# Altium PCB LMAT_AMT_MAG_V1.PcbDoc (part 1 of 2)
Units mm, origin at the board's own origin, x right, y up, seen from the top; angles counter-clockwise.
Board outline 36.5 x 40.75 mm, 2 copper layers (Top Layer, Bottom Layer), stack 1.58 mm thick; 80 components, 45 nets, 210 pads, 110 vias.
Unrouted connection lines stored in the file: 13.
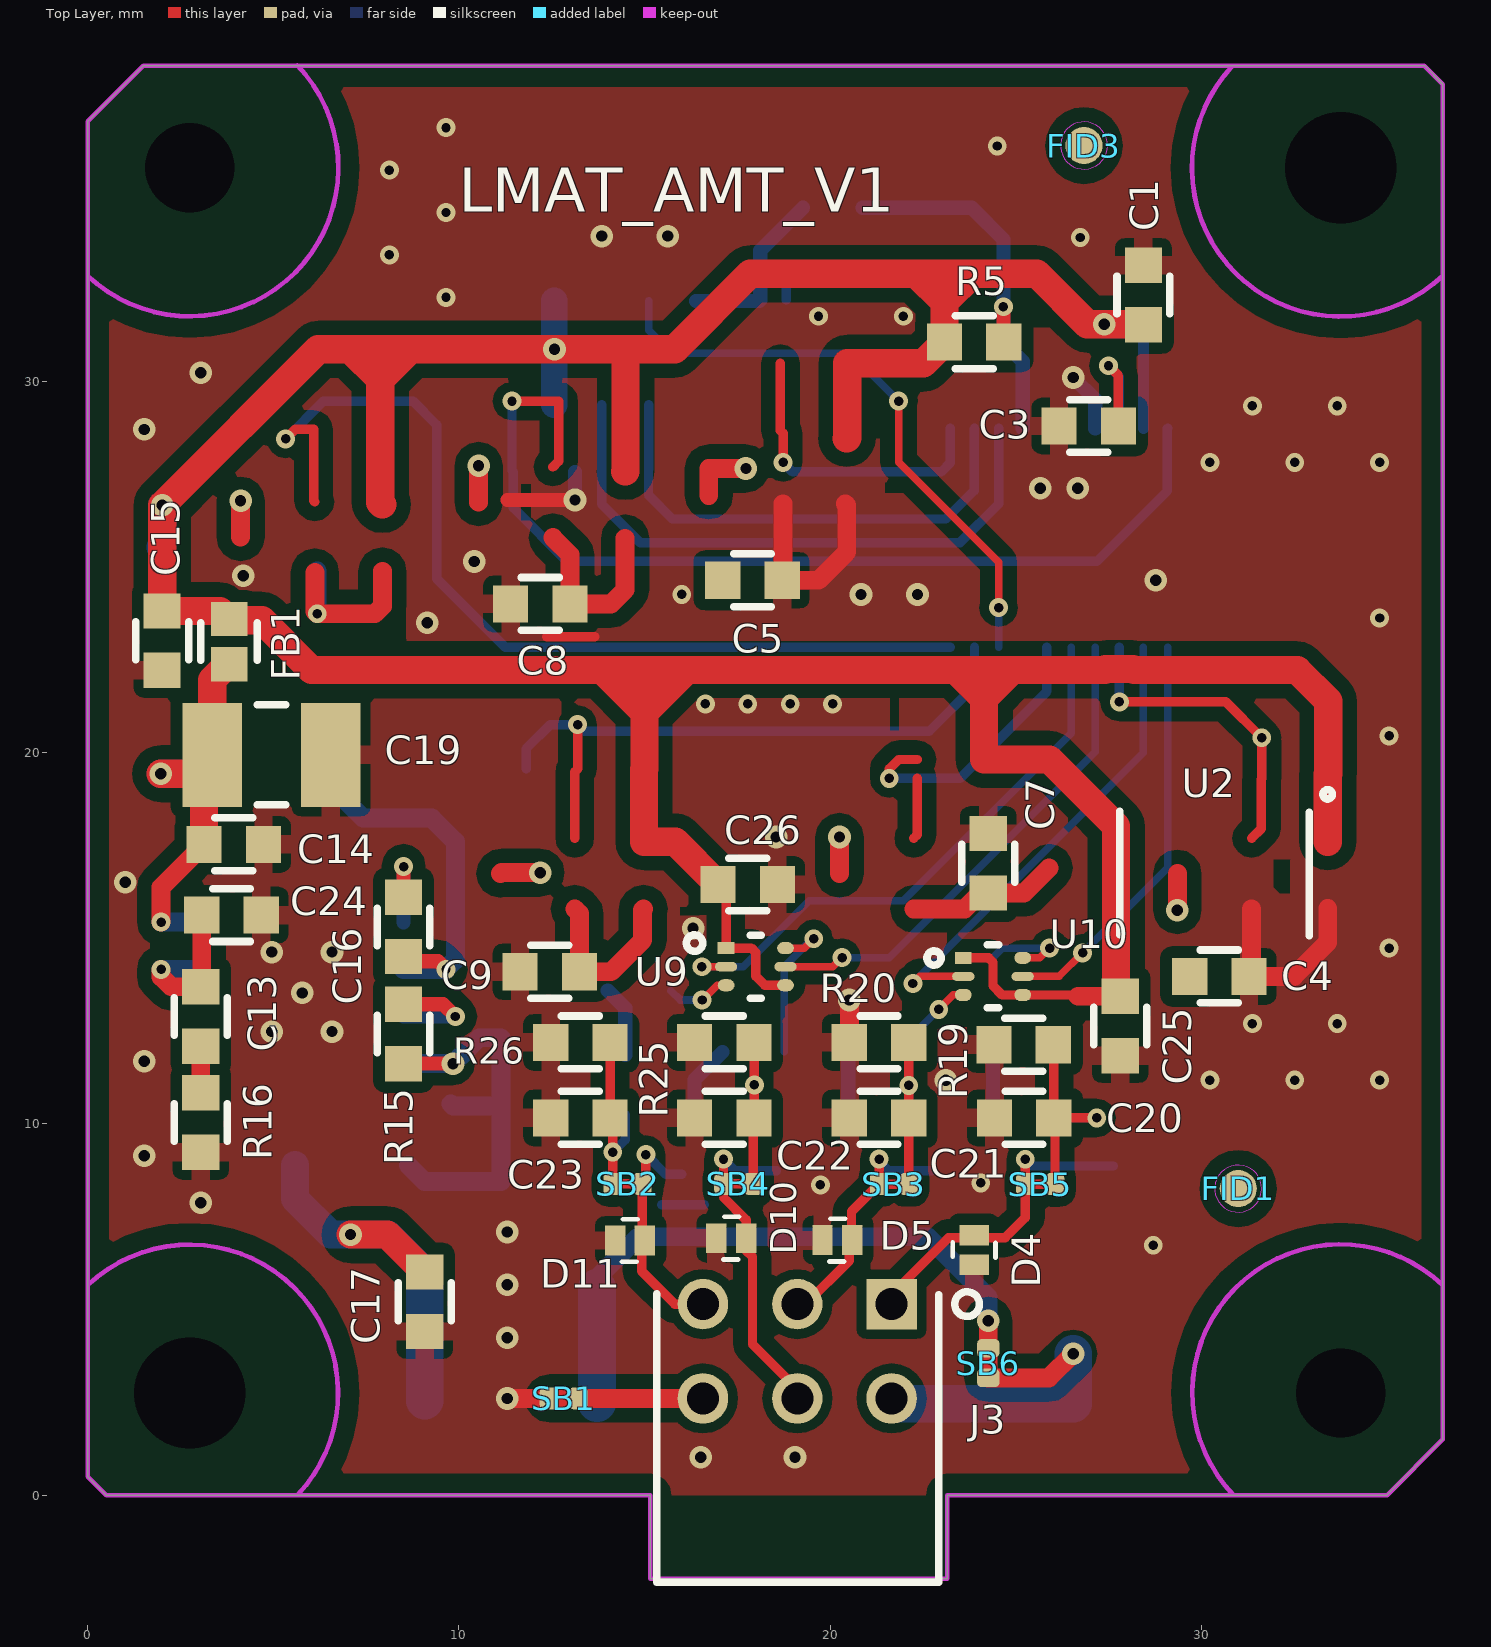
[diagram p0: Top Layer view]
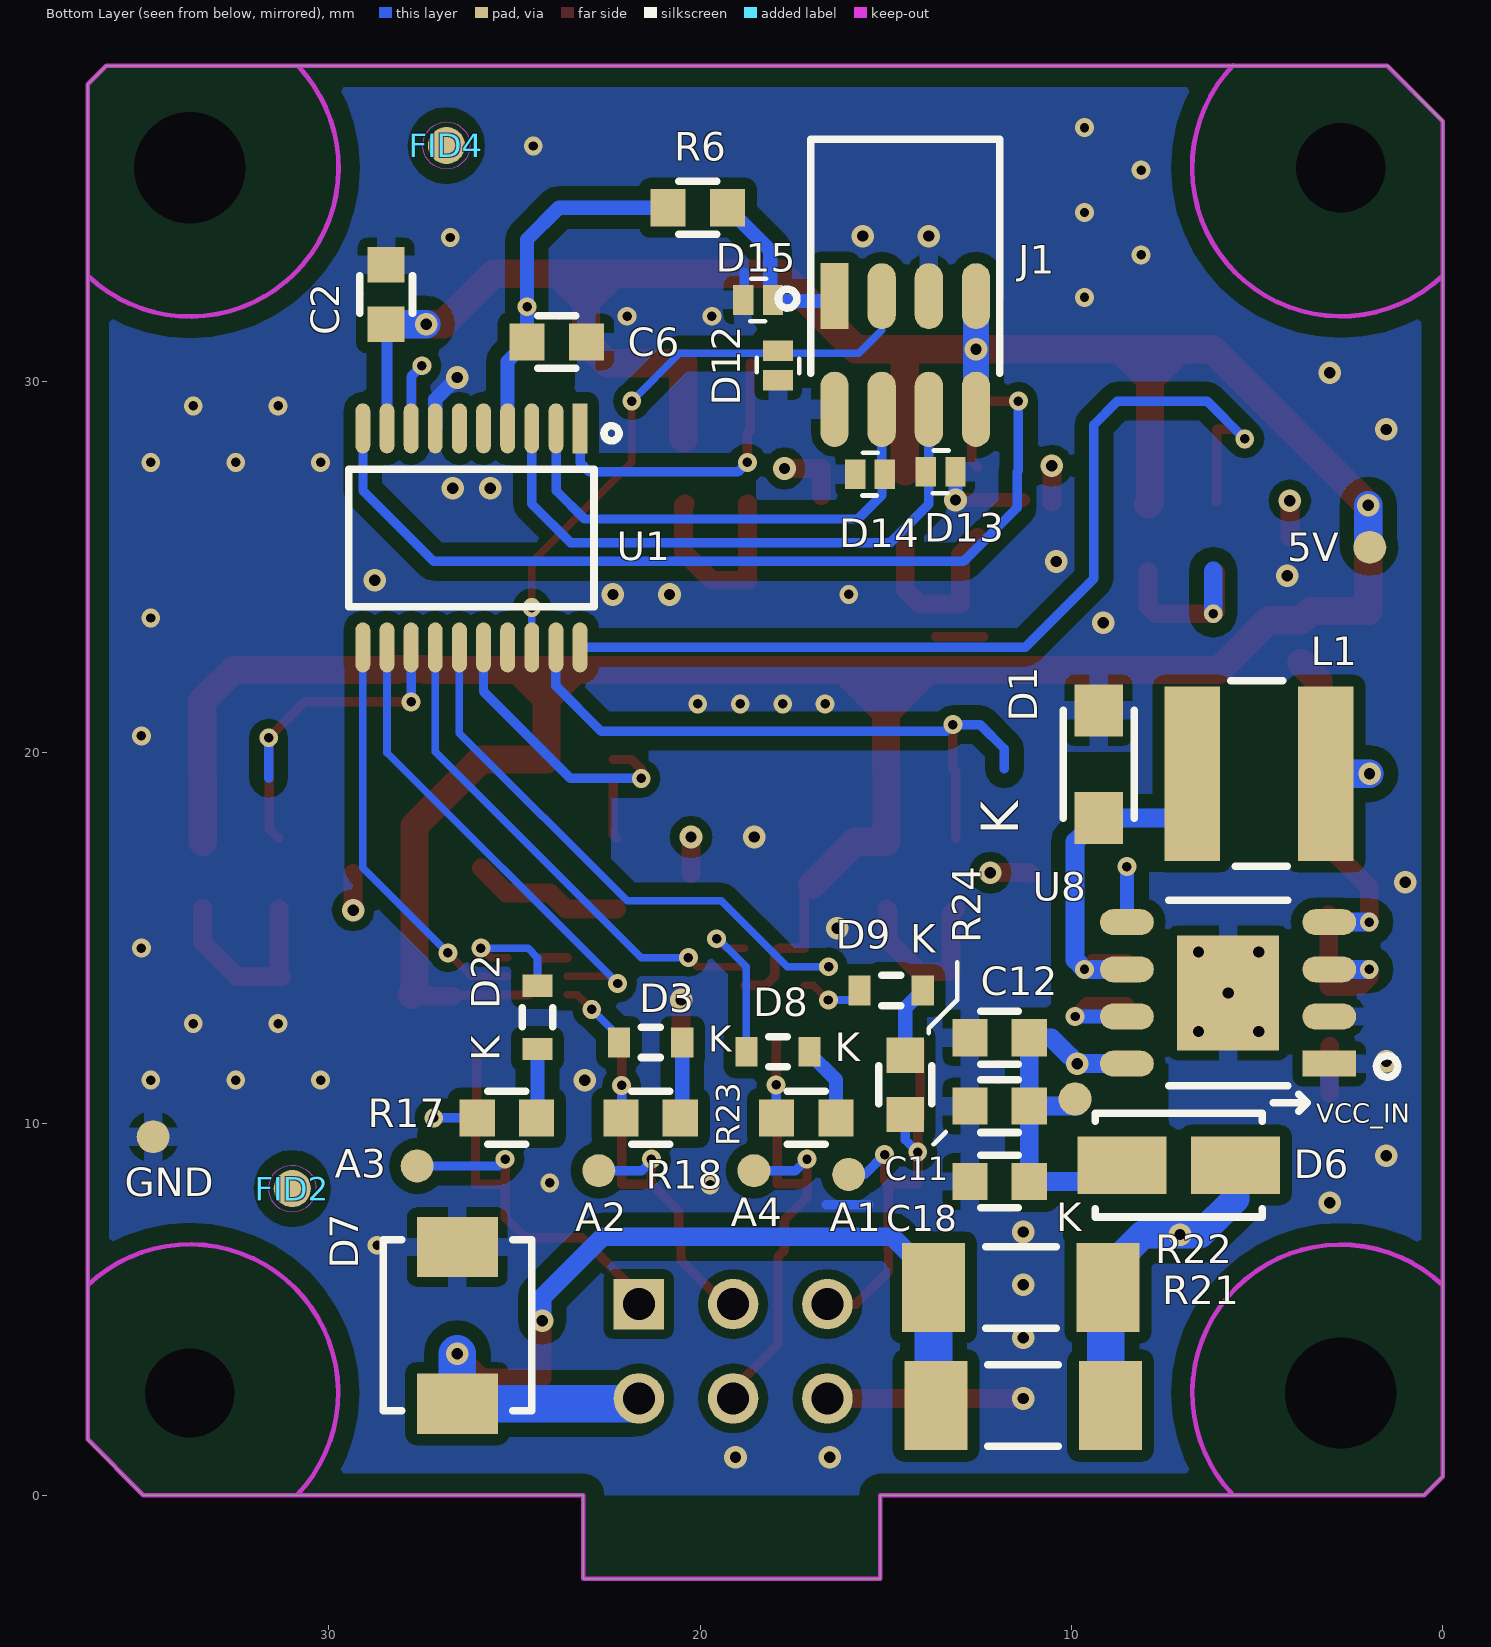
[diagram p1: Bottom Layer view, seen from below]
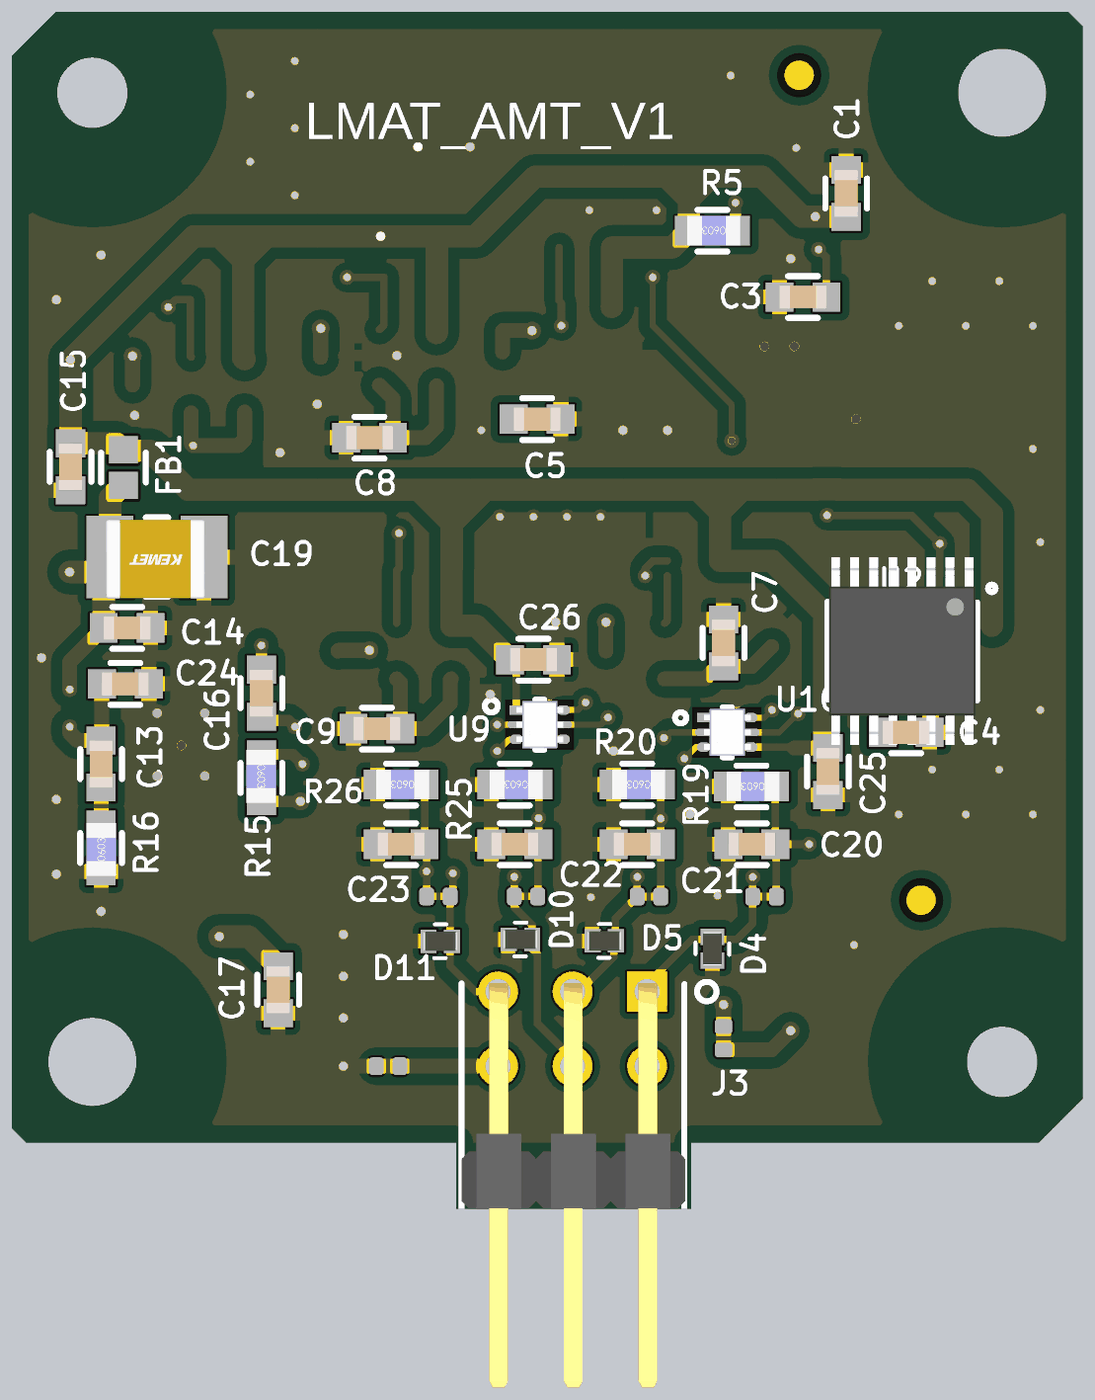
[diagram p3: 3D render of the assembled board from above, using the file's embedded part models]
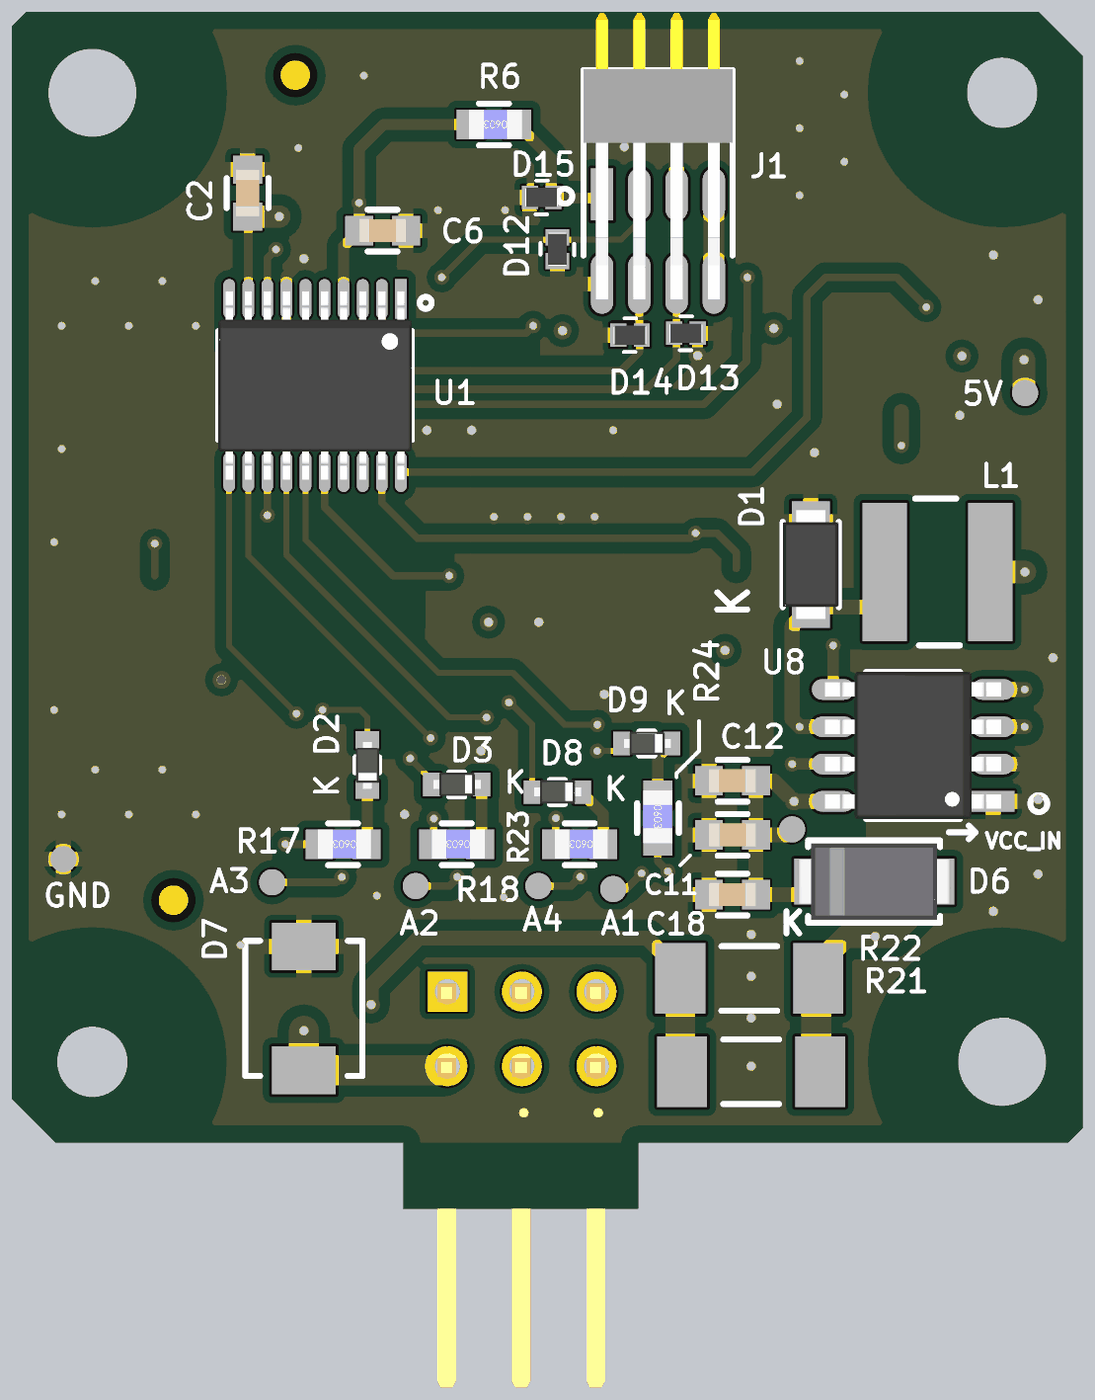
[diagram p4: 3D render of the assembled board from below, using the file's embedded part models]

## Layer stack, top to bottom
Top Solder: solder mask 0.0102, Solder Resist, Dk 3.5
Top Layer: signal copper 0.0356
Dielectric 1: core 1.5086, FR-4, Dk 4.2
Bottom Layer: signal copper 0.0356
Bottom solder: solder mask 0.0102, Solder Resist, Dk 3.5

## Board outline
0,0.5 0.5,0 15.15,0 15.15,-2.25 23.15,-2.25 23.15,0 35,0 36.5,1.5 36.5,38 36,38.5 1.5,38.5 0,37

## Design rules (kind name [scope] priority, off if disabled: settings)
AcuteAngle [All] p1: minimum=6.00000000000000E+0001 checktracksonly=TRUE
Clearance Clearance_keepout [(OnLayer('Keep-Out Layer'))] p1: gap=0.762 ignorepadtopadclearanceinfootprint=TRUE except(0: Arc-Text Arc-Hole Track-Text Track-Hole SMDPad-Text SMDPad-Hole THPad-Text THPad-Hole Via-Text Via-Hole Fill-Text Fill-Hole Poly-Text Poly-Hole Region-Text Region-Hole Text-Text Text-Hole; 0.254: Arc-Track Arc-SMDPad Arc-THPad Arc-Via Track-Track Track-SMDPad Track-THPad Track-Via SMDPad-Region; 0.381: Arc-Arc; 0.508: Arc-Poly Track-Poly; 0.635: Fill-Fill Poly-Poly)
Clearance [All] p2: gap=0.381 ignorepadtopadclearanceinfootprint=TRUE except(0: Arc-Hole Track-Hole SMDPad-Hole THPad-Hole Via-Hole Fill-Hole Poly-Hole Region-Hole Text-Hole; 0.203: Arc-Track Track-SMDPad SMDPad-Via; 0.254: Track-Track Track-Via Track-Region SMDPad-SMDPad SMDPad-Region THPad-Poly THPad-Region Via-Poly Via-Region; 0.305: SMDPad-Poly; 0.508: Poly-Poly)
ComponentClearance [All] p1 off: gap=0.508 collisioncheckmode=3 verticalgap=0.508 showdistances=FALSE
FanoutControl Fanout_Default [All] p1: bgadir=Out bgaviamode=Centered fanoutstyle=Auto fanoutdirection=Alternating viagrid=0.025 // Fanout_Default (Default Rule)
Height Bottom [All] p1: minheight=0 maxheight=5.5 prefheight=5
Height TOP [All] p2: minheight=0 maxheight=1.6 prefheight=1.5
Height [All] p3: minheight=0 maxheight=10 prefheight=5
HoleSize [All] p1: absolutevalues=TRUE maxlimit=25.4 minlimit=0.025 maxpercent=80.000 minpercent=20.000
HoleToHoleClearance [All] p1 off: gap=0.254 allowstackedmicrovias=TRUE
LayerPairs [All] p1 off: enforce=TRUE
MinimumSolderMaskSliver [All] p1 off: minsoldermaskwidth=0.076
PolygonConnect PolygonConnect_Via [IsVia] p1: connectstyle=Direct reliefconductorwidth=0.254 reliefentries=4 polygonreliefangle="90 Angle" airgapwidth=0.254
PolygonConnect [All] p2: connectstyle=Relief reliefconductorwidth=0.508 reliefentries=4 polygonreliefangle="90 Angle" airgapwidth=0.254
RoomDefinition AMT_HALL_EFFECT [InComponentClass('AMT_HALL_EFFECT')] p1: confinementstyle=ConfineIn formatcopy=TRUE lockcomponents=FALSE outline -1010.377,-263.778 -959.577,-263.778 -959.577,-238.378 -1010.377,-238.378
RoutingVias RoutingVias_PWR [InNetClass('PWR')] p1: holewidth=0.305 width=0.61 viastyle="Through Hole" minholewidth=0.305 minwidth=0.61 maxholewidth=0.508 maxwidth=1.016
RoutingVias [All] p2: holewidth=0.254 width=0.508 viastyle="Through Hole" minholewidth=0.254 minwidth=0.508 maxholewidth=0.508 maxwidth=1.016
SilkToSilkClearance [All] p1: silktosilkclearance=0.051
SilkToSolderMaskClearance [IsPad] p1: minsilkscreentomaskgap=0.051 clearancetoexposedcopper=TRUE
SolderMaskExpansion [All] p1: expansion=0.102
UnRoutedNet [All] p1: checkbadconnections=TRUE
UnpouredPolygon [All] p1: allowunpoured=TRUE allowshelved=TRUE
Width [All] p1: maxlimit=5.08 minlimit=0.203 preferedwidth=0.381
15 further rules are at their usual default settings.

## Classes and differential pairs
component class "Components Class 1": A3 C20 D4 R17 R19
net class PWR: GND VCC_5V VCC_IN
component class AMT_HALL_EFFECT: C1 C2 C3 C4 C5 C6 C7 C8 C9 C11 C12 C13 C14 C16 C17 C18 C19 C20 C21 C22 C23 D1 D4 D6 D9 D10 D11 FB1 FID1 FID2 FID3 FID4 GND J3 L1 R5 R6 R15 R16 R17 R18 R19 R20 R21 R22 R23 R24 R25 R26 U1 U8 U9 U10

## Components (designator, comment, footprint, x,y, rotation, side; value= is the part's Value field where it differs from the comment)
5V "Test Point- 35mil" TP_35M_DIA 1.968,25.527 r180 bottom locked
A1 "Test Point- 35mil" TP_35M_DIA 16.002,8.636 r180 bottom locked
A2 "Test Point- 35mil" TP_35M_DIA 22.733,8.738 r180 bottom locked
A3 "Test Point- 35mil" TP_35M_DIA 27.624,8.865 r180 bottom locked
A4 "Test Point- 35mil" TP_35M_DIA 18.554,8.738 r180 bottom locked
C1 "CAP CER 0.1UF 50V 10% X7R 0603" SMDC0603 28.435,32.321 r90 top locked value=DNP
C2 "CAP CER 1UF 25V X7R 0603" SMDC0603 28.461,32.334 r270 bottom locked value=1µF
C3 "CAP CER 1UF 25V X7R 0603" SMDC0603 26.961,28.795 r180 top locked value=1µF
C4 "CAP CER 0.1UF 50V 10% X7R 0603" SMDC0603 30.48,13.97 r0 top locked value=0.1uF
C5 "CAP CER 0.1UF 50V 10% X7R 0603" SMDC0603 17.907,24.638 r0 top locked value=0.1uF
C6 "CAP CER 0.1UF 50V 10% X7R 0603" SMDC0603 23.863,31.056 r180 bottom locked value=0.1uF
C7 "CAP CER 1UF 25V X7R 0603" SMDC0603 24.257,17.018 r270 top locked value=1µF
C8 "CAP CER 0.047UF 50V X7R 0603" SMDC0603 12.192,24.003 r0 top locked value=0.047µF
C9 "CAP CER 0.047UF 50V X7R 0603" SMDC0603 12.446,14.097 r0 top locked value=0.047µF
C11 "CAP CER 0.22UF 50V X7R 0603" SMDC0603 11.938,10.477 r180 bottom locked value=0.22µF
C12 "CAP CER 0.1UF 50V 10% X7R 0603" SMDC0603 11.938,12.319 r0 bottom locked value=0.1uF
C13 "CAP CER 0.022UF 50V 10% X7R 0603" SMDC0603 3.048,12.89 r270 top locked value=0.022uF
C14 "CAP CER 0.22UF 50V X7R 0603" SMDC0603 3.937,17.526 r180 top locked value=0.22µF
C15 "CAP CER 0.1UF 50V 10% X7R 0603" SMDC0603 2.007,23.012 r270 top locked value=DNP
C16 "CAP CER 0.22UF 50V X7R 0603" SMDC0603 8.509,15.303 r270 top locked value=0.22µF
C17 "CAP CER 0.1UF 50V 10% X7R 0603" SMDC0603 9.08,5.207 r270 top locked value=0.1uF
C18 "CAP CER 0.1UF 50V 10% X7R 0603" SMDC0603 11.938,8.445 r0 bottom locked value=0.1uF
C19 "CAP CER 47UF 16V X6S 1210" SMDC1210 4.953,19.939 r180 top locked value=47uF
C20 "CAP CER 10000PF 50V X8R 0603" SMDC0603 25.222,10.16 r0 top locked value=DNP
C21 "CAP CER 10000PF 50V X8R 0603" SMDC0603 21.316,10.16 r0 top locked value=DNP
C22 "CAP CER 10000PF 50V X8R 0603" SMDC0603 17.145,10.16 r0 top locked value=DNP
C23 "CAP CER 10000PF 50V X8R 0603" SMDC0603 13.271,10.16 r0 top locked value=DNP
C24 "CAP CER 0.022UF 50V 10% X7R 0603" SMDC0603 3.873,15.621 r0 top locked value=DNP
C25 "CAP CER 0.1UF 50V 10% X7R 0603" SMDC0603 27.813,12.636 r270 top locked value=0.1uF
C26 "CAP CER 0.1UF 50V 10% X7R 0603" SMDC0603 17.78,16.447 r0 top locked value=0.1uF
D1 "DIODE SCHOTTKY 40V 1A DO-219AB" SODFL370X110-2N 9.271,19.685 r90 bottom locked value=SS1FL4HM3/H
D2 "Diode Schottky 30V 100mA Surface Mount EMD2" SOD1700X70N-V2 24.384,12.866 r90 bottom locked value=RB501SM-30FHT2R
D3 "Diode Schottky 30V 100mA Surface Mount EMD2" SOD1700X70N-V2 21.336,12.192 r0 bottom locked value=RB501SM-30FHT2R
D4 "TVS DIODE 5.5V 14V 2X1SON" DFN65P100X65X45-2N 23.876,6.604 r90 top locked value=SZESD7410N2T5G
D5 "TVS DIODE 5.5V 14V 2X1SON" DFN65P100X65X45-2N 20.193,6.869 r0 top value=SZESD7410N2T5G
D6 "DIODE GEN PURP 1KV 1A DO214AC" DIOM4227X23N-2N 7.112,8.89 r180 bottom locked value=S1MHE3_A/I
D7 "TVS DIODE 23.1V 48.3V SMB" DIOM4336X26B 26.543,4.572 r270 bottom locked value=SM6T27CAY
D8 "Diode Schottky 30V 100mA Surface Mount EMD2" SOD1700X70N-V2 17.907,11.938 r0 bottom locked value=RB501SM-30FHT2R
D9 "Diode Schottky 30V 100mA Surface Mount EMD2" SOD1700X70N-V2 14.859,13.589 r0 bottom locked value=RB501SM-30FHT2R
D10 "TVS DIODE 5.5V 14V 2X1SON" DFN65P100X65X45-2N 17.335,6.92 r0 top locked value=SZESD7410N2T5G
D11 "TVS DIODE 5.5V 14V 2X1SON" DFN65P100X65X45-2N 14.605,6.858 r0 top locked value=SZESD7410N2T5G
D12 "TVS DIODE 5.5V 14V 2X1SON" DFN65P100X65X45-2N 17.907,30.424 r90 bottom locked value=DNP
D13 "TVS DIODE 5.5V 14V 2X1SON" DFN65P100X65X45-2N 13.525,27.559 r0 bottom value=DNP
D14 "TVS DIODE 5.5V 14V 2X1SON" DFN65P100X65X45-2N 15.43,27.495 r180 bottom value=DNP
D15 "TVS DIODE 5.5V 14V 2X1SON" DFN65P100X65X45-2N 18.44,32.187 r180 bottom locked value=DNP
FB1 "FERRITE BEAD 600 OHM 0603 1LN" SMDL0603 3.81,22.987 r90 top value=BLM18KG601SH1D
FID1 "FID40X40" FID40X40 30.988,8.255 r90 top locked
FID2 "FID40X40" FID40X40 30.988,8.255 r90 bottom locked
FID3 "FID40X40" FID40X40 26.835,36.347 r90 top locked
FID4 "FID40X40" FID40X40 26.835,36.347 r90 bottom locked
GND "Test Point- 35mil" TP_35M_DIA 34.734,9.652 r90 bottom locked
J1 "CONN HEADER R/A 6POS 2.54MMCONN HEADER SMD R/A 8POS 1.27MM" HDRRA8W53P127_2X4_9754X251X343P 14.478,30.766 r180 bottom locked value=FTSH-104-02-L-DH
J3 "CONN HEADER R/A 6POS 2.54MM" HDRRA6W86P254_2X3_1344X254X528P 19.114,3.874 r180 top locked value=M20-9950345
L1 "FIXED IND 47UH 700MA 460MOHM SMD" INDP5050X20N 4.953,19.431 r0 bottom locked value=47UH
R5 "RES SMD 47K OHM 1% 1/10W 0603" SMDR0603 23.876,31.051 r180 top locked value=DNP
R6 "RES SMD 0.0OHM JUMPER 1/10W 0603" SMDR0603 20.066,34.671 r0 bottom locked value=0R
R15 "RES SMD 1M OHM 5% 1/10W 0603" SMDR0603 8.509,12.421 r270 top locked value=1M
R16 "RES SMD 22K OHM 1% 1/10W 0603" SMDR0603 3.048,10.033 r90 top locked value=22K
R17 "RES SMD 105 OHM 1% 1/10W 0603" SMDR0603 25.209,10.16 r0 bottom locked value="105 Ohms"
R18 "RES SMD 105 OHM 1% 1/10W 0603" SMDR0603 21.336,10.16 r0 bottom locked value="105 Ohms"
R19 "RES SMD 210 OHM 1% 1/10W 0603" SMDR0603 25.209,12.128 r180 top locked value="210 Ohms"
R20 "RES SMD 210 OHM 1% 1/10W 0603" SMDR0603 21.316,12.192 r180 top locked value="210 Ohms"
R21 "RES 100 OHM 1% 1W MELF 0207" RESMELF5922N 11.303,2.413 r180 bottom locked value=100R
R22 "RES 100 OHM 1% 1W MELF 0207" RESMELF5922N 11.367,5.588 r180 bottom locked value=100R
R23 "RES SMD 105 OHM 1% 1/10W 0603" SMDR0603 17.145,10.16 r0 bottom locked value="105 Ohms"
R24 "RES SMD 105 OHM 1% 1/10W 0603" SMDR0603 14.478,11.049 r270 bottom locked value="105 Ohms"
R25 "RES SMD 210 OHM 1% 1/10W 0603" SMDR0603 17.145,12.192 r180 top locked value="210 Ohms"
R26 "RES SMD 210 OHM 1% 1/10W 0603" SMDR0603 13.271,12.192 r180 top locked value="210 Ohms"
SB1 "EMS_SB20" SB_20 12.827,2.603 r180 top locked net-tie
SB2 "EMS_SB10" SB_10 14.541,8.382 r0 top locked net-tie
SB3 "EMS_SB10" SB_10 21.717,8.377 r180 top locked net-tie
SB4 "EMS_SB10" SB_10 17.526,8.382 r180 top locked net-tie
SB5 "EMS_SB10" SB_10 25.654,8.377 r180 top locked net-tie
SB6 "EMS_SB20" SB_20 24.257,3.556 r90 top locked net-tie
U1 "IC MCU 8BIT 8KB FLASH 20TSSOP" SOP65P640X120-20N 26.162,25.781 r270 bottom locked value=STM8AF6223PCU
U2 "SENSOR HALL EFFECT SPI 16TSSOP" SOP65P640X120-16N 30.35,16.74 r180 top locked value=MLX90363KGO-ABB-000-RE
U8 "IC REG BUCK 5V 1.8A 8DSO" SOIC127P600X170_HS-9N 5.784,13.526 r0 bottom locked value=TLE8366EV50XUMA1
U9 "MOSFET 2P-CH 20V 0.55A SOT666" SOTFL50P160X60-6N 17.996,14.232 r0 top locked value=PMDT670UPE,115
U10 "MOSFET 2P-CH 20V 0.55A SOT666" SOTFL50P160X60-6N 24.384,13.97 r0 top locked value=PMDT670UPE,115
VCC_IN "Test Point- 35mil" TP_35M_DIA 9.906,10.668 r90 bottom locked

## Footprints (in the part's own frame and the unit in brackets; to place one, negate y for a bottom-side part, rotate by r counter-clockwise, add the part's x,y. Pads: shape width x height; smd on the part's side, far side on the other; paste and mask are expansions set on the pad)
DFN65P100X65X45-2N [mm] "DFN, 2-Leads, Body 0.60x1.00mm, Pitch 0.65mm, IPC Medium Density"
  rect 0.55x0.8 smd mask+0.076: 1(-0.4,0) 2(0.4,0)
  silkscreen extent -0.21,-0.58 0.21,0.58, body extent -0.56,-0.32 0.56,0.33, height 0.45
DIOM4227X23N-2N [mm] "Molded Diode, 2-Leads, Body 4.25x2.67mm, IPC Medium Density"
  rect 2.4x1.55 smd: 1(-1.525,0) 2(1.525,0)
  silkscreen extent -2.25,-1.4 2.25,1.4, body extent -2.6,-1.3 2.6,1.3, height 2.4
DIOM4336X26B [mm] "Molded Diode, 2-Leads, Body 4.32x3.63mm, IPC Low Density"
  rect 1.62x2.18 smd: 1(-2.11,0) 2(2.11,0)
  silkscreen extent -2.3,-2 2.3,2, body extent -2.52,-1.97 2.52,1.97, height 2.65
FID40X40 [mm]
  round 1 smd paste-2 mask+0.254: 0(0,0)
  Top Layer keep-out circle w0.025: c0,0 r0.635
HDRRA6W86P254_2X3_1344X254X528P [mm] "CONN HEADER R/A 6POS 2.54MM"
  rect 1.36x1.36 hole 0.86 mask+0.076: 1(-2.54,-1.27)
  round 1.36 hole 0.86 mask+0.076: 2(0,-1.27) 3(2.54,-1.27) 4(-2.54,1.27) 5(0,1.27) 6(2.54,1.27)
  silkscreen extent -4.9,-1.6 3.78,6.22, body extent -3.84,-1.55 3.78,12.21, height 4.54
HDRRA8W53P127_2X4_9754X251X343P [mil] "CONN HEADER SMD R/A 8POS 1.27MM"
  rect 30x70 smd: 1(-75,60)
  oval 30x80 smd: 2(-75,-60) 4(-25,-60) 6(25,-60) 8(75,-60)
  oval 30x70 smd: 3(-25,60) 5(25,60) 7(75,60)
  silkscreen extent -135,-22 100,227, body extent -100,-81 100,303, height 134
INDP5050X20N [mm] "Precision Wire Wound Inductor, 2-Leads, Body 5.00x5.00mm, IPC Medium Density"
  rect 1.5x4.7 smd: 1(1.8,0) 2(-1.8,0)
  Top Layer pour cut-out: 0.79,2.5 0.79,-2.5 -0.79,-2.5 -0.79,2.5
  silkscreen extent -0.76,-2.5 0.76,2.5, body extent -2.6,-2.6 2.6,2.6, height 2
RESMELF5922N [mm] "MELF Resistor, 2-Leads, Body 5.90x2.20mm, IPC Medium Density"
  rect 1.7x2.4 smd: 1(-2.35,0) 2(2.35,0)
  silkscreen extent -0.95,-1.1 0.95,1.1, body extent -2.95,-1.1 2.95,1.1, height 2.19
SB_10 [mm]
  rrect50% 0.5x0.6 smd mask+0.076: 1(-0.4,0) 2(0.4,0)
  Top Layer lines w0.254: -0.4,0 0.4,0
SB_20 [mm]
  rrect50% 0.5x0.6 smd mask+0.076: 1(-0.4,0) 2(0.4,0)
  Top Layer lines w0.508: 0.4,0 -0.4,0
SMDC0603 [mm]
  rect 0.95x1 smd mask+0.076: 1(-0.8,0) 2(0.8,0)
  Top Layer pour cut-out: -0.203,0.559 -0.203,-0.584 0.203,-0.584 0.203,0.559
  silkscreen extent -0.51,-0.71 0.51,0.71, body extent -0.8,-0.4 0.8,0.4, height 0.81
SMDC1210 [mm] "GRM32ER71A476KE15L, CAP CER 47UF 10V X7R 1210"
  rect 1.6x2.8 smd mask+0.076: 1(-1.6,0) 2(1.6,0)
  Top Layer pour cut-out: -0.508,1.35 0.381,1.35 0.381,-1.35 -0.508,-1.35
  silkscreen extent -0.38,-1.35 0.38,1.35, body extent -1.65,-1.29 1.75,1.41, height 1.41
SMDL0603 [mm] "Chip Inductor, 2-Leads, Body 1.60x0.80mm, IPC Medium Density"
  rect 0.92x0.98 smd: 1(-0.61,0) 2(0.61,0)
  silkscreen extent -0.51,-0.76 0.51,0.76, body extent -0.87,-0.48 0.87,0.48, height 1
SMDR0603 [mm]
  rect 0.95x1 smd mask+0.076: 1(-0.8,0) 2(0.8,0)
  Top Layer pour cut-out: -0.254,0.61 0.254,0.61 0.254,-0.61 -0.254,-0.61
  silkscreen extent -0.51,-0.71 0.51,0.71, body extent -0.95,-0.5 0.85,0.5, height 0.32
SOD1700X70N-V2 [mm]
  rect 0.6x0.8 smd mask+0.076: 1(-0.85,0) 2(0.85,0)
  silkscreen extent -0.25,-0.41 0.25,0.41, body extent -0.82,-0.41 0.78,0.39, height 0.7
SODFL370X110-2N [mm] "SODFL, 2-Leads, Body 1.80x3.70mm, IPC Medium Density"
  rect 1.4x1.3 smd: 1(1.45,0) 2(-1.45,0)
  Top Layer pour cut-out: -0.395,-0.95 -0.395,0.95 0.316,0.95 0.316,-0.95
  silkscreen extent -1.45,-0.96 1.45,0.96, body extent -1.85,-0.95 1.85,0.95, height 1.1
SOIC127P600X170_HS-9N [mm] "SOIC, 8-Leads, Body 4.90x3.90mm, Pitch 1.27mm, Thermal Pad 3.10x2.75mm, IPC Medium Density"
  rect 1.45x0.7 smd: 1(-2.725,1.905)
  oval 1.45x0.7 smd: 2(-2.725,0.635) 3(-2.725,-0.635) 4(-2.725,-1.905) 5(2.725,-1.905) 6(2.725,-0.635) 7(2.725,0.635) 8(2.725,1.905)
  rect 2.75x3.1 smd paste-3 mask+0.102: 9(0,0)
  silkscreen extent -4.57,-2.5 1.6,2.5, body extent -3,-2.5 3,2.5, height 1.7
SOP65P640X120-16N [mm] "TSSOP16"
  rect 0.35x1.6 on Mech16 mask+0.076: 1(-2.275,-2.8)
  oval 0.35x1.6 on Mech16 mask+0.076: 2(-1.625,-2.8) 3(-0.975,-2.8) 4(-0.325,-2.8) 5(0.325,-2.8) 6(0.975,-2.8) 7(1.625,-2.8) 8(2.275,-2.8) 9(2.275,2.8) 10(1.625,2.8) 11(0.975,2.8) 12(0.325,2.8) 13(-0.325,2.8) 14(-0.975,2.8) 15(-1.625,2.8) 16(-2.275,2.8)
  silkscreen extent -3.17,-2.26 2.55,1.68, body extent -2.5,-3.2 2.5,3.2, height 1.1
SOP65P640X120-20N [mm] "TSOP, 20-Leads, Body 6.50x4.40mm, Pitch 0.65mm, IPC Medium Density"
  rect 1.35x0.4 smd mask+0.076: 1(-2.95,2.925)
  oval 1.35x0.4 smd mask+0.076: 2(-2.95,2.275) 3(-2.95,1.625) 4(-2.95,0.975) 5(-2.95,0.325) 6(-2.95,-0.325) 7(-2.95,-0.975) 8(-2.95,-1.625) 9(-2.95,-2.275) 10(-2.95,-2.925) 11(2.95,-2.925) 12(2.95,-2.275) 13(2.95,-1.625) 14(2.95,-0.975) 15(2.95,-0.325) 16(2.95,0.325) 17(2.95,0.975) 18(2.95,1.625) 19(2.95,2.275) 20(2.95,2.925)
  silkscreen extent -3.02,-3.3 1.85,3.97, body extent -3.2,-3.3 3.2,3.3, height 1.2
SOTFL50P160X60-6N [mm] "SOTFL, 6-Leads, Body 1.60x1.60mm, Pitch 0.50mm, IPC Medium Density"
  rect 0.45x0.325 smd mask+0.076: 1(-0.8,0.5)
  oval 0.6x0.25 smd mask+0.076: 2(-0.8,0) 5(0.8,0)
  oval 0.45x0.325 smd mask+0.076: 3(-0.8,-0.5) 4(0.8,-0.5) 6(0.8,0.5)
  silkscreen extent -1.87,-0.85 0.15,0.86, body extent -0.8,-0.8 0.8,0.8, height 0.57
TP_35M_DIA [mil]
  round 35 smd mask+3: 1(0,0)

## Part data
5V A1 A2 A3 A4 GND VCC_IN: library part EMS-TP35MIL-S, Internal Part Number=EMS-TP35MIL-S, Part Type="Test Point- 35mil"
C1 C4 C5 C6 C12 C15 C17 C18 C25 C26: library part ECA0U10K50V0-SC, Manufacturer="TDK Corporation", Manufacturer Part Number=CGA3E2X7R1H104K080AA, Temp Co=X7R, Vendor Part Number=445-5666-1-ND, 1st Auxiliary Field=50V, 2nd Auxiliary Field=±10%, 3rd Auxiliary Field="RoHS Compliant", Component Height (mm)=0.90mm, Internal Part Number=ECA0U10K50V0-SC, Part Type="CAP CER 0.1UF 50V X7R 0603", Vendor Name=Digi-Key
C2 C3 C7: library part ECA1U00L25V0-SC, Manufacturer="TDK Corporation", Manufacturer Part Number=CGA3E1X7R1E105K080AE, Temp Co="-55°C ~ 125°C", Vendor Part Number=445-173628-1-ND, 1st Auxiliary Field=25V, 2nd Auxiliary Field=±10%, 3rd Auxiliary Field="RoHS Compliant", Component Height (mm)=0.95mm, Internal Part Number=ECA1U00L25V0-SC, Part Type="CAP CER 1UF 25V X7R 0603", Vendor Name=Digi-Key
C8 C9: library part ECA47N0L50V-SC, Manufacturer="TDK Corporation", Manufacturer Part Number=CGA3E2X7R1H473K080AA, Temp Co="-55°C ~ 125°C", Vendor Part Number=445-5664-1-ND, 1st Auxiliary Field=50V, 2nd Auxiliary Field=±10%, 3rd Auxiliary Field="RoHS Compliant", Component Height (mm)=0.9mm, Internal Part Number=ECA47N0L50V-SC, Part Type="CAP CER 0.047UF 50V X7R 0603", Vendor Name=Digi-Key
C11 C14 C16: library part ECA0U22L50V0-SC, Manufacturer="Murata Electronics North America", Manufacturer Part Number=GCJ188R71H224KA01D, Temp Co="-55°C ~ 125°C", Vendor Part Number=490-14410-1-ND, 1st Auxiliary Field=50V, 2nd Auxiliary Field=±10%, 3rd Auxiliary Field="RoHS Compliant", Component Height (mm)=0.90mm, Internal Part Number=ECA0U22L50V0-SC, Part Type="CAP CER 0.22UF 50V X7R 0603", Vendor Name=Digi-Key
C13 C24: library part ECA0U022K50V0-SC, Manufacturer="TDK Corporation", Manufacturer Part Number=CGA3E2X7R1H223K080AA, Temp Co=X7R, Vendor Part Number=445-5663-1-ND, 1st Auxiliary Field=50V, 2nd Auxiliary Field=±10%, Component Height (mm)=0.90mm, Internal Part Number=ECA0U022K50V0-SC, Part Type="CAP CER 0.022UF 50V X7R 0603", Vendor Name=Digi-Key
C19: library part ECA47U0L16V0-SH, Manufacturer="Murata Electronics North America", Manufacturer Part Number=GRT32EC81C476KE13L, Temp Co="-55°C ~ 105°C", Vendor Part Number=490-12494-1-ND, 1st Auxiliary Field=16V, 2nd Auxiliary Field=±10%, 3rd Auxiliary Field="RoHS Compliant", 4th Auxiliary Field=AEC-Q200, Component Height (mm)=2.70mm, Internal Part Number=ECA47U0L16V0-SH, Part Type="CAP CER 47UF 16V X6S 1210", Vendor Name=Digi-Key
C20 C21 C22 C23: library part ECA0U01L50V0-SC, Manufacturer="TDK Corporation", Manufacturer Part Number=CGA3E2X8R1H103K080AA, Temp Co="-55°C ~ 150°C", Vendor Part Number=445-5892-1-ND, 1st Auxiliary Field=50V, 2nd Auxiliary Field=±10%, 3rd Auxiliary Field="RoHS Compliant", 4th Auxiliary Field=AEC-Q200, Component Height (mm)=0.80mm, Internal Part Number=ECA0U01L50V0-SC, Part Type="CAP CER 10000PF 50V X8R 0603", Vendor Name=Digi-Key
D1: library part EDDVS1A0040V0-S, Manufacturer="Vishay Semiconductor Diodes Division", Manufacturer Part Number=SS1FL4HM3/H, Temp Co="-55°C ~ 150°C", Vendor Part Number=SS1FL4HM3/HGICT-ND, 1st Auxiliary Field=40V, 2nd Auxiliary Field=1A, 3rd Auxiliary Field="RoHS Compliant", Component Height (mm)=1.08mm, Internal Part Number=EDDVS1A0040V0-S, Part Type="DIODE SCHOTTKY 40V 1A DO-219AB", Vendor Name=Digi-Key
D2 D3 D8 D9: library part EDDR0A1030V0-S, Manufacturer="Rohm Semiconductor", Manufacturer Part Number=RB501SM-30FHT2R, Temp Co="125°C (Max)", Vendor Part Number=RB501SM-30FHT2RCT-ND, 1st Auxiliary Field=30V, 2nd Auxiliary Field=100mA, 3rd Auxiliary Field="RoHS Compliant", Component Height (mm)=0.70mm, Internal Part Number=EDDR0A1030V0-S, Part Type="Diode Schottky 30V 100mA Surface Mount EMD2", Vendor Name=Digi-Key
D4 D5 D10 D11 D12 D13 D14 D15: library part EDDOS16A010V0-S, "TVS DIODE 8V 20V 2X2DFN", Manufacturer="ON Semiconductor", Manufacturer Part Number=SZESD7410N2T5G, Temp Co="-55°C ~ 150°C (TJ)", Vendor Part Number=SZESD7410N2T5GOSCT-ND, 1st Auxiliary Field=10V, 2nd Auxiliary Field=16A, 3rd Auxiliary Field="RoHS Compliant", 4th Auxiliary Field=AEC-Q101, Component Height (mm)=0.40mm, Internal Part Number=EDDOS16A010V0-S, Part Type="TVS DIODE 8V 20V 2X2DFN", Vendor Name=Digi-Key
D6: library part EDDVS1A001000V-S, Manufacturer="Vishay Semiconductor Diodes Division", Manufacturer Part Number=S1MHE3_A/I, Temp Co="-55°C ~ 150°C", Vendor Part Number=S1MHE3_A/IGICT-ND, 1st Auxiliary Field=1000V, 2nd Auxiliary Field=1A, 3rd Auxiliary Field="RoHS Compliant", Component Height (mm)=2.29mm, Internal Part Number=EDDVS1A001000V-S, Part Type="DIODE GEN PURP 1KV 1A DO214AC", Vendor Name=Digi-Key
D7: library part EDDST83A025V7-S, Manufacturer=STMicroelectronics, Manufacturer Part Number=SM6T27CAY, Temp Co="-55°C ~ 150°C (TJ)", Vendor Part Number=497-10798-1-ND, 1st Auxiliary Field=25.7V, 2nd Auxiliary Field=600W, 3rd Auxiliary Field="RoHS Compliant", Component Height (mm)=2.65mm, Internal Part Number=EDDST83A025V7-S, Part Type="TVS DIODE 23.1V 48.3V SMB", Vendor Name=Digi-Key
FB1: library part EIN600R1A30-S, Manufacturer="Murata Electronics North America", Manufacturer Part Number=BLM18KG601SH1D, Temp Co="-55°C ~ 125°C", Vendor Part Number=490-13259-1-ND, 1st Auxiliary Field="150 mOhm", 2nd Auxiliary Field=1.3A, 3rd Auxiliary Field="RoHS Compliant", 4th Auxiliary Field=AEC-Q200, Component Height (mm)=0.95mm, Internal Part Number=EIN600R1A30-S, Part Type="FERRITE BEAD 600 OHM 0603 1LN", Vendor Name=Digi-Key
FID1 FID2 FID3 FID4: library part FID_40X40
J1: library part ECN-FTSH-104-02-L-DH-****, "CONN HEADER SMD R/A 8POS 1.27MM", Manufacturer="Samtec Inc.", Manufacturer Part Number=FTSH-104-02-L-DH, Temp Co="-55°C ~ 125°C", Vendor Part Number=SAM11248-ND, 1st Auxiliary Field=8POS, 2nd Auxiliary Field="2 rows", 3rd Auxiliary Field="RoHS Compliant", Component Height (mm)=3.43mm, Internal Part Number=ECN-FTSH-104-02-L-DH-****, Part Type="CONN HEADER SMD R/A 8POS 1.27MM", Vendor Name=Digi-Key
J3: library part ECN-M20-9950345-0003, Manufacturer="Harwin Inc.", Manufacturer Part Number=M20-9950345, Temp Co="-40°C ~ 105°C", Vendor Part Number=952-2092-ND, 1st Auxiliary Field=6pos, 2nd Auxiliary Field="2 rows", 3rd Auxiliary Field="RoHS Compliant", Component Height (mm)=5.08mm, Internal Part Number=ECN-M20-9950345-0003, Part Type="CONN HEADER R/A 6POS 2.54MM", Vendor Name=Digi-Key
L1: library part EIN47U0N700M-S, Manufacturer="Bourns Inc.", Manufacturer Part Number=SRN5020TA-470M, Temp Co="-55°C ~ 125°C", Vendor Part Number=SRN5020TA-470MCT-ND, 1st Auxiliary Field=700MA, 2nd Auxiliary Field=±20%, 3rd Auxiliary Field="460 mOhm", 4th Auxiliary Field=AEC-Q200, Component Height (mm)=2.00mm, Internal Part Number=EIN47U0N700M-S, Part Type="FIXED IND 47UH 700MA 460MOHM SMD", Vendor Name=Digi-Key
R5: library part ERE47K0G110-SC, Manufacturer=Yageo, Manufacturer Part Number=AT0603FRE0747KL, Temp Co="-55°C ~ 155°C", Vendor Part Number=YAG2129CT-ND, 1st Auxiliary Field=0.1W, 2nd Auxiliary Field=±1%, 3rd Auxiliary Field="RoHS Compliant", Component Height (mm)=0.55mm, Internal Part Number=ERE47K0G110-SC, Part Type="RES SMD 47K OHM 1% 1/10W 0603", Vendor Name=Digi-Key
R6: library part ERE0R00110-SC, Manufacturer="Panasonic Electronic Components", Manufacturer Part Number=ERJ-3GEY0R00V, Vendor Part Number=P0.0GCT-ND, 1st Auxiliary Field=0.1W, 2nd Auxiliary Field=Jumper, Component Height (mm)=0.55mm, Internal Part Number=ERE0R00110-SC, Part Type="RES SMD 0.0OHM JUMPER 1/10W 0603", Vendor Name=Digi-Key
R15: library part ERE1M00K110-SC, Manufacturer="Vishay Dale", Manufacturer Part Number=RCA06031M00JNEA, Temp Co="-55°C ~ 155°C", Vendor Part Number=541-2216-1-ND, 1st Auxiliary Field=0.1W, 2nd Auxiliary Field=±5%, 3rd Auxiliary Field="RoHS Compliant", 4th Auxiliary Field=AEC-Q200, Component Height (mm)=0.50mm, Internal Part Number=ERE1M00K110-SC, Part Type="RES SMD 1M OHM 5% 1/10W 0603", Vendor Name=Digi-Key
R16: library part ERE22K0G110-SC, Manufacturer="Panasonic Electronic Components", Manufacturer Part Number=ERJ-3EKF2202V, Temp Co="-55°C ~ 155°C", Vendor Part Number=P22.0KHCT-ND, 1st Auxiliary Field=0.1W, 2nd Auxiliary Field=±1%, 3rd Auxiliary Field="RoHS Compliant", 4th Auxiliary Field=AEC-Q200, Component Height (mm)=0.55mm, Internal Part Number=ERE22K0G110-SC, Part Type="RES SMD 22K OHM 1% 1/10W 0603", Vendor Name=Digi-Key
R17 R18 R23 R24: library part ERE105RG110-SC, Manufacturer="Panasonic Electronic Components", Manufacturer Part Number=ERJ-3EKF1050V, Temp Co="-55°C ~ 155°C", Vendor Part Number=P105HCT-ND, 1st Auxiliary Field=0.1W, 2nd Auxiliary Field=±1%, 3rd Auxiliary Field="RoHS Compliant", 4th Auxiliary Field=AEC-Q200, Component Height (mm)=0.55mm, Internal Part Number=ERE105RG110-SC, Part Type="RES SMD 105 OHM 1% 1/10W 0603", Vendor Name=Digi-Key
R19 R20 R25 R26: library part ERE210RG110-SC, Manufacturer="Panasonic Electronic Components", Manufacturer Part Number=ERJ-3EKF2100V, Temp Co="-55°C ~ 155°C", Vendor Part Number=P210HCT-ND, 1st Auxiliary Field=0.1W, 2nd Auxiliary Field=±1%, 3rd Auxiliary Field="RoHS Compliant", 4th Auxiliary Field=AEC-Q200, Component Height (mm)=0.55mm, Internal Part Number=ERE210RG110-SC, Part Type="RES SMD 210 OHM 1% 1/10W 0603", Vendor Name=Digi-Key
R21 R22: library part ERE100RG100-S, Manufacturer="Stackpole Electronics Inc", Manufacturer Part Number=MLFA1FTC100R, Temp Co="-55°C ~ 155°C", Vendor Part Number=MLFA1FTC100RCT-ND, 1st Auxiliary Field=1W, 2nd Auxiliary Field=±1%, 3rd Auxiliary Field="RoHS Compliant", Component Height (mm)=2.4mm, Internal Part Number=ERE100RG100-S, Part Type="RES 100 OHM 1% 1W MELF 0207", Vendor Name=Digi-Key
SB1 SB2 SB3 SB4 SB5 SB6: "*"
  SB1 SB6: Internal Part Number=EMS_SB20
  SB2 SB3 SB4 SB5: Internal Part Number=EMS_SB10
U1: library part EICSTMTSSOP-20-1691, Manufacturer=STMicroelectronics, Manufacturer Part Number=STM8AF6223PCU, Temp Co="-40°C ~ 125°C (TA)", Vendor Part Number=497-17896-ND, 1st Auxiliary Field="3V ~ 5.5V", 2nd Auxiliary Field=8-Bit, 3rd Auxiliary Field="RoHS Compliant", Component Height (mm)=1.2mm, Internal Part Number=EICSTMTSSOP-20-1691, Part Type="IC MCU 8BIT 8KB FLASH 20TSSOP", Vendor Name=Digi-Key
U2: library part EICMTTSSOP-16-1690, Manufacturer="Melexis Technologies NV", Manufacturer Part Number=MLX90363KGO-ABB-000-RE, Temp Co="-40°C ~ 125°C (TA)", Vendor Part Number=MLX90363KGO-ABB-000-RECT-ND, 1st Auxiliary Field="4.5V ~ 5.5V", 2nd Auxiliary Field=15.5mA, 3rd Auxiliary Field="RoHS Compliant", Component Height (mm)=1.1mm, Internal Part Number=EICMTTSSOP-16-1690, Part Type="SENSOR HALL EFFECT SPI 16TSSOP", Vendor Name=Digi-Key
U8: library part EICITSOIC-08-0001, Manufacturer="Infineon Technologies", Manufacturer Part Number=TLE8366EV50XUMA1, Temp Co="-40°C ~ 150°C (TJ)", Vendor Part Number=TLE8366EV50XUMA1CT-ND, 1st Auxiliary Field=45V, 2nd Auxiliary Field=1.8A, 3rd Auxiliary Field="RoHS Compliant", 4th Auxiliary Field=AEC-Q100, Component Height (mm)=1.7mm, Internal Part Number=EICITSOIC-08-0001, Part Type="IC REG BUCK 5V 1.8A 8DSO", Vendor Name=Digi-Key
U9 U10: library part EICNUSOT666-06-0004, Manufacturer="Nexperia USA Inc.", Manufacturer Part Number=PMDT670UPE,115, Temp Co="-55°C ~ 150°C (TJ)", Vendor Part Number=1727-1334-1-ND, 1st Auxiliary Field=20V, 2nd Auxiliary Field=550mA, 3rd Auxiliary Field="RoHS Compliant", 4th Auxiliary Field=AEC-Q101, Component Height (mm)=0.6mm, Internal Part Number=EICNUSOT666-06-0004, Part Type="MOSFET 2P-CH 20V 0.55A SOT666", Vendor Name=Digi-Key

## Free pads (board coordinates)
  round 0.102 hole 3 unplated: MH(2.75,2.75) MH(33.75,35.75)
  round 0.102 hole 2.4 unplated: MH(2.75,35.75) MH(33.75,2.75)

## Via types
v1: diameter 0.508, hole 0.254, Top Layer to Bottom Layer, tented both sides, 63 vias
v2: diameter 0.61, hole 0.305, Top Layer to Bottom Layer, tented both sides, 47 vias

## Nets (pads, with @x,y where several pads share a name; then routed paths per layer and width w, separated by ;. In a path a pad name is that pad's centre, name@x,y a point inside that pad or via, vN(x,y) a via of type N, cw(c..) or ccw(c..) an arc to the next point about the centre after c; other vN are vias at no path point)
CS1: U1.10 | length 26.7
  Top Layer w0.254: v1(11.43,29.464) 12.689,29.464 12.689,27.849 12.53,27.69
  Bottom Layer w0.254: v1(11.43,29.464) 11.43,27.588 11.462,27.555 11.462,26.598 12.914,25.146 27.178,25.146 29.083,27.051 29.083,28.727 U1.10@29.087,28.731
CS2: U1.13 | length 9.5
  Top Layer w0.254: v1(27.787,21.362) 30.657,21.362 v1(31.623,20.396) ; 31.35,17.69 31.612,17.952 31.612,19.279 31.623,19.29 v1@31.623,20.32
  Bottom Layer w0.254: v1(27.787,21.362) U1.13@27.787,22.831 ; 31.623,19.304 v1(31.623,20.396)
GND: C1.2 C2.1 C3.2 C4.2 C5.2 C6.2 C7.1 C8.1 C9.1 C11.1 C12.2 C14.1 C15.2 C17.2 C18.2 C19.1 C20.1 C21.1 C22.1 C23.1 C24.2 C25.2 C26.2 D1.1 D4.1 D5.1 D7.1 D10.1 D11.1 D12.1 D13.1 D14.1 D15.1 GND.1 J1.2 J1.5 R16.1 R19.2 R20.2 R25.2 R26.2 SB1.2 U1.7 U8.1 U8.2 U8.9 | length 20.4
  Top Layer w0.254: 11.303,26.797 11.308,26.802 ; 12.368,23.119 13.657,23.119
  Top Layer w0.381: 11.308,26.802 v2(13.125,26.802)
  Top Layer w0.508: v2(11.303,2.603) SB1.2@12.427,2.603 ; 18.73,26.7 18.73,24.661 C5.2@18.707,24.638 19.685,24.638 20.447,25.4 20.447,26.659 20.406,26.7 ; v2(20.511,13.335) 20.516,13.33 R20.2@20.516,12.192 ; 31.35,15.79 31.35,14.04 C4.2@31.28,13.97 32.486,13.97 33.401,14.885 33.401,15.801
  Bottom Layer w0.254: 15.459,7.816 16.608,7.816 ; D15.1@18.816,32.187 18.816,32.939
  Bottom Layer w0.381: v2(13.125,26.802) D13.1@13.125,27.559 ; v2(26.543,30.099) 27.137,29.505 U1.7@27.137,28.731
  other v1: 28.702,6.731 19.736,8.357 24.054,8.407 30.226,11.176 32.512,11.176 34.798,11.176 31.369,12.7 33.655,12.7 35.052,14.732 35.052,20.447 16.637,21.311 17.78,21.311 18.923,21.311 20.066,21.311 34.798,23.622 16.002,24.257 30.226,27.813 32.512,27.813 34.798,27.813 31.369,29.337 33.655,29.337 19.685,31.75 21.971,31.75 9.652,32.258 8.128,33.401 26.733,33.871 9.652,34.544 8.128,35.687 24.498,36.335 9.652,36.83
  other v2: 16.51,1.016 19.05,1.016 11.303,4.242 11.303,5.664 11.303,7.087 3.048,7.874 1.524,9.144 23.114,11.176 1.524,11.684 4.956,12.484 6.582,12.484 5.784,13.525 4.956,14.626 6.582,14.626 16.307,15.265 1.016,16.51 18.542,17.724 9.144,23.495 20.828,24.257 22.352,24.257 28.765,24.638 4.191,24.765 10.414,25.146 25.654,27.114 26.67,27.114 1.524,28.702 3.048,30.226 13.843,33.909 15.621,33.909
MISO: U1.17
MOSI: U1.16 | length 7.5
  Top Layer w0.254: v1(21.59,19.304) 21.59,19.558 21.844,19.812 22.341,19.812
  Bottom Layer w0.254: v1(21.59,19.304) 23.495,19.304 25.837,21.646 U1.16@25.837,22.831
NetC3_1: C3.1 U1.8 | length 3.5
  Top Layer w0.254: v1(27.495,30.416) 27.761,30.151 C3.1@27.761,28.794
  Bottom Layer w0.254: v1(27.495,30.416) 27.787,30.125 U1.8@27.787,28.731
NetC8_2: C8.2 C9.2 | length 9.7
  Top Layer w0.508: 12.53,25.79 12.992,25.328 C8.2@12.992,24.003 14.097,24.003 14.478,24.384 14.478,25.77 ; 13.12,15.79 13.246,15.664 C9.2@13.246,14.097 14.097,14.097 14.948,14.948 14.948,15.763 14.975,15.79
NetC13_1: C13.1 C24.1 U8.3 | length 4.4
  Top Layer w0.508: v1(1.981,14.161) 1.981,13.957 2.248,13.691 C13.1@3.048,13.691 3.059,13.691 3.073,13.705 C24.1@3.073,15.621
  Bottom Layer w0.508: v1(1.981,14.161) U8.3@3.059,14.161
NetC13_2: C13.2 R16.2 | length 1.3
  Top Layer w0.508: R16.2@3.048,10.833 C13.2@3.048,12.09
NetC14_2: C14.2 C19.2 FB1.1 L1.2 U8.4 | length 11.3
  Top Layer w0.508: v1(1.981,15.43) 1.981,16.37 C14.2@3.137,17.526
  Top Layer w0.762: v2(1.974,19.431) 2.845,19.431 C19.2@3.137,19.723 ; C14.2@3.137,17.526 C19.2@3.137,19.723 ; FB1.1@3.81,22.412 3.353,21.955 C19.2@3.353,19.939 C19.2@3.137,19.723
  Bottom Layer w0.508: v1(1.981,15.43) U8.4@3.059,15.431
  Bottom Layer w0.762: v2(1.974,19.431) L1.2@3.153,19.431
NetC16_1: C16.1 U8.5 | length 2.5
  Top Layer w0.381: C16.1@8.509,15.976 v1(8.509,16.929) v1@8.509,16.954
  Bottom Layer w0.381: U8.5@8.509,15.431 v1(8.509,16.929) v1@8.509,16.954
NetC16_2: C16.2 D1.2 L1.1 U8.6 | length 10.1
  Top Layer w0.381: C16.2@8.509,14.376 9.436,14.376 v1(9.652,14.16)
  Bottom Layer w0.508: L1.1@6.753,19.431 6.753,18.901 7.419,18.235 D1.2@9.271,18.235 9.906,17.6 9.906,14.414 v1(9.652,14.16) U8.6@8.509,14.16
NetC17_1: C17.1 D6.2 R21.2 R22.2 | length 11.2
  Top Layer w0.762: v2(7.08,7.017) 8.07,7.017 C17.1@9.08,6.007
  Bottom Layer w0.762: D6.2@5.587,8.89 5.587,7.977 6.547,7.017 v2(7.08,7.017) 8.083,7.017 9.016,6.084 R22.2@9.016,5.588 R22.2@9.08,5.588
  Bottom Layer w1.016: R21.2@9.08,2.54 R22.2@9.08,5.588
NetC20_2: C20.2 R17.2 R19.1 SB5.1 | length 6.1
  Top Layer w0.254: R19.1@26.01,12.128 26.022,12.116 C20.2@26.022,10.16 ; SB5.1@26.054,8.377 26.054,10.128 C20.2@26.022,10.16 ; v1(27.178,10.16) C20.2@26.022,10.16
  Bottom Layer w0.254: R17.2@26.01,10.16 v1(27.178,10.16)
NetC21_2: C21.2 R18.2 R20.1 SB3.1 | length 4.7
  Top Layer w0.254: R20.1@22.116,12.172 C21.2@22.116,10.16 22.117,10.159 SB3.1@22.117,8.377
  Bottom Layer w0.254: R18.2@22.117,10.159 v1(22.117,11.035)
NetC22_2: C22.2 R23.2 R25.1 SB4.1 | length 4.7
  Top Layer w0.254: SB4.1@17.926,8.382 17.926,10.141 C22.2@17.945,10.16 17.958,10.173 v1(17.958,11.049) 17.958,12.179 R25.1@17.945,12.192
  Bottom Layer w0.254: R23.2@17.945,10.16 17.958,10.173 v1(17.958,11.049)
NetC23_2: C23.2 R24.2 R26.1 SB2.1 | length 5
  Top Layer w0.254: R26.1@14.072,12.192 C23.2@14.072,10.16 14.142,10.09 v1(14.142,9.236) SB2.1@14.142,8.382
  Bottom Layer w0.254: v1(14.142,9.236) 14.478,9.573 R24.2@14.478,10.249
NetD2_1: D2.1 R17.1 | length 1.9
  Bottom Layer w0.381: D2.1@24.384,12.016 24.384,10.249 R17.1@24.473,10.16
NetD2_2: D2.2 U10.6 | length 3.2
  Top Layer w0.203: U10.6@25.184,14.47 25.646,14.47 v1(25.908,14.732)
  Bottom Layer w0.203: D2.2@24.384,13.716 24.384,14.478 24.638,14.732 v1(25.908,14.732)
NetD3_1: D3.1 R18.1 | length 2.1
  Bottom Layer w0.381: D3.1@20.486,12.192 20.486,10.21 R18.1@20.536,10.16
NetD3_2: D3.2 U10.3 | length 2
  Top Layer w0.203: v1(22.924,13.081) 23.312,13.47 U10.3@23.584,13.47
  Bottom Layer w0.203: D3.2@22.186,12.192 22.186,12.344 v1(22.924,13.081)
NetD7_2: D7.2 J3.3 SB6.1 | length 8.9
  Top Layer w0.508: SB6.1@24.257,3.156 25.889,3.156 v2(26.543,3.81)
  Bottom Layer w1.016: 21.653,2.603 21.795,2.462 D7.2@26.543,2.462 v2(26.543,3.81)
NetD8_1: D8.1 R23.1 | length 2.1
  Bottom Layer w0.381: R23.1@16.345,10.16 16.345,11.188 D8.1@17.095,11.938
NetD8_2: D8.2 U9.6 | length 4.3
  Top Layer w0.203: U9.6@18.796,14.732 19.304,14.732 v1(19.558,14.986)
  Bottom Layer w0.203: D8.2@18.757,11.938 18.757,14.232 19.511,14.986 v1(19.558,14.986)
NetD9_1: D9.1 R24.1 | length 1.9
  Bottom Layer w0.381: D9.1@14.009,13.589 14.478,13.12 R24.1@14.478,11.849
NetD9_2: D9.2 U9.3 | length 1.8
  Top Layer w0.203: v1@16.554,13.329 16.958,13.732 U9.3@17.196,13.732
  Bottom Layer w0.203: D9.2@15.709,13.589 15.963,13.335 v1(16.548,13.335)
NetD15_2: D15.2 J1.1 R6.1 | length 4.7
  Bottom Layer w0.203: D15.2@18.091,32.163 D15.2@18.115,32.187
  Bottom Layer w0.381: J1.1@16.383,32.163 D15.2@18.091,32.163 ; D15.2@18.115,32.187 18.115,33.52 R6.1@19.266,34.671
NetJ3_1: J3.1 SB1.1 | length 3.3
  Top Layer w0.508: SB1.1@13.227,2.603 16.573,2.603
NetR15_1: R15.1 U8.7 | length 2.9
  Top Layer w0.381: R15.1@8.509,13.22 9.576,13.22 v1(9.906,12.89)
  Bottom Layer w0.381: U8.7@8.509,12.89 v1(9.906,12.89)
NetR21_1: R21.1 R22.1 SB6.2 | length 16.4
  Top Layer w0.508: SB6.2@24.257,3.956 v2(24.257,4.699)
  Bottom Layer w0.508: R22.1@13.717,5.588 13.717,5.843 14.834,6.96 22.631,6.96 24.257,5.334 v2(24.257,4.699)
  Bottom Layer w1.016: R21.1@13.717,2.476 R22.1@13.717,5.588
nRESET: C6.1 R5.1 R6.2 U1.4 | length 10.4
  Top Layer w0.254: R5.1@24.663,31.064 R5.1@24.676,31.051
  Top Layer w0.381: R5.1@24.663,31.064 v1(24.663,32.004)
  Bottom Layer w0.381: R6.2@20.866,34.671 23.812,34.671 24.663,33.82 v1(24.663,32.004) C6.1@24.663,31.056 25.187,30.532 U1.4@25.187,28.731
S1: U1.14 U9.5 | length 13.5
  Top Layer w0.203: U9.5@18.796,14.232 20.074,14.232 v1(20.32,14.478)
  Bottom Layer w0.203: v1(20.32,14.478) 21.593,14.478 27.137,20.022 U1.14@27.137,22.831
S2: U1.1 U10.5 | length 19.4
  Top Layer w0.203: U10.5@25.184,13.97 26.162,13.97 v1(26.797,14.605)
  Top Layer w0.254: 18.658,30.48 18.658,28.672 18.73,28.6 v1(18.73,27.815)
  Bottom Layer w0.203: v1(26.797,14.605) 29.087,16.895 29.087,22.831
  Bottom Layer w0.254: v1(18.73,27.815) 18.986,27.559 22.989,27.559 23.237,27.807 U1.1@23.237,28.731
S3: U1.20 U10.2 | length 39.4
  Top Layer w0.203: v1(22.225,13.779) 22.416,13.97 U10.2@23.584,13.97
  Top Layer w0.254: v1(5.334,28.448) 5.588,28.702 6.085,28.702 6.085,26.785 6.12,26.75
  Bottom Layer w0.203: v1(22.225,13.779) 28.437,19.991 28.437,22.831
  Bottom Layer w0.254: v1(5.334,28.448) 6.35,29.464 8.763,29.464 9.398,28.829 9.398,24.684 11.251,22.831 U1.20@23.237,22.831
S4: U1.19 U9.2 | length 33.1
  Top Layer w0.203: v1(16.543,14.232) U9.2@17.196,14.232
  Top Layer w0.254: 13.12,17.69 13.12,19.481 13.197,19.558 v1(13.197,20.753)
  Bottom Layer w0.203: v1(16.543,14.232) 17.661,14.232 19.431,16.002 21.971,16.002 26.487,20.518 26.487,22.831
  Bottom Layer w0.254: 11.811,19.558 11.811,20.1 12.464,20.753 v1(13.197,20.753) 13.376,20.574 22.669,20.574 23.887,21.791 U1.19@23.887,22.831
SCLK: U1.15
SIGNAL1: A1.1 D11.2 J3.4 SB2.2 | length 6.4
  Top Layer w0.254: v1(15.037,9.169) 15.037,8.477 SB2.2@14.941,8.382 14.941,6.615 14.93,6.604 14.93,6.025 15.811,5.143 16.573,5.143
  Bottom Layer w0.254: v1(15.037,9.169) 15.57,8.636 A1.1@16.002,8.636